# Altium PCB Power_Box_V0.PcbDoc (part 4 of 4)
Units mm, origin at the board's own origin, x right, y up, seen from the top; angles counter-clockwise.
Board outline 145 x 110 mm, 2 copper layers (Top Layer, Bottom Layer); 400 components, 300 nets, 1205 pads, 270 vias.
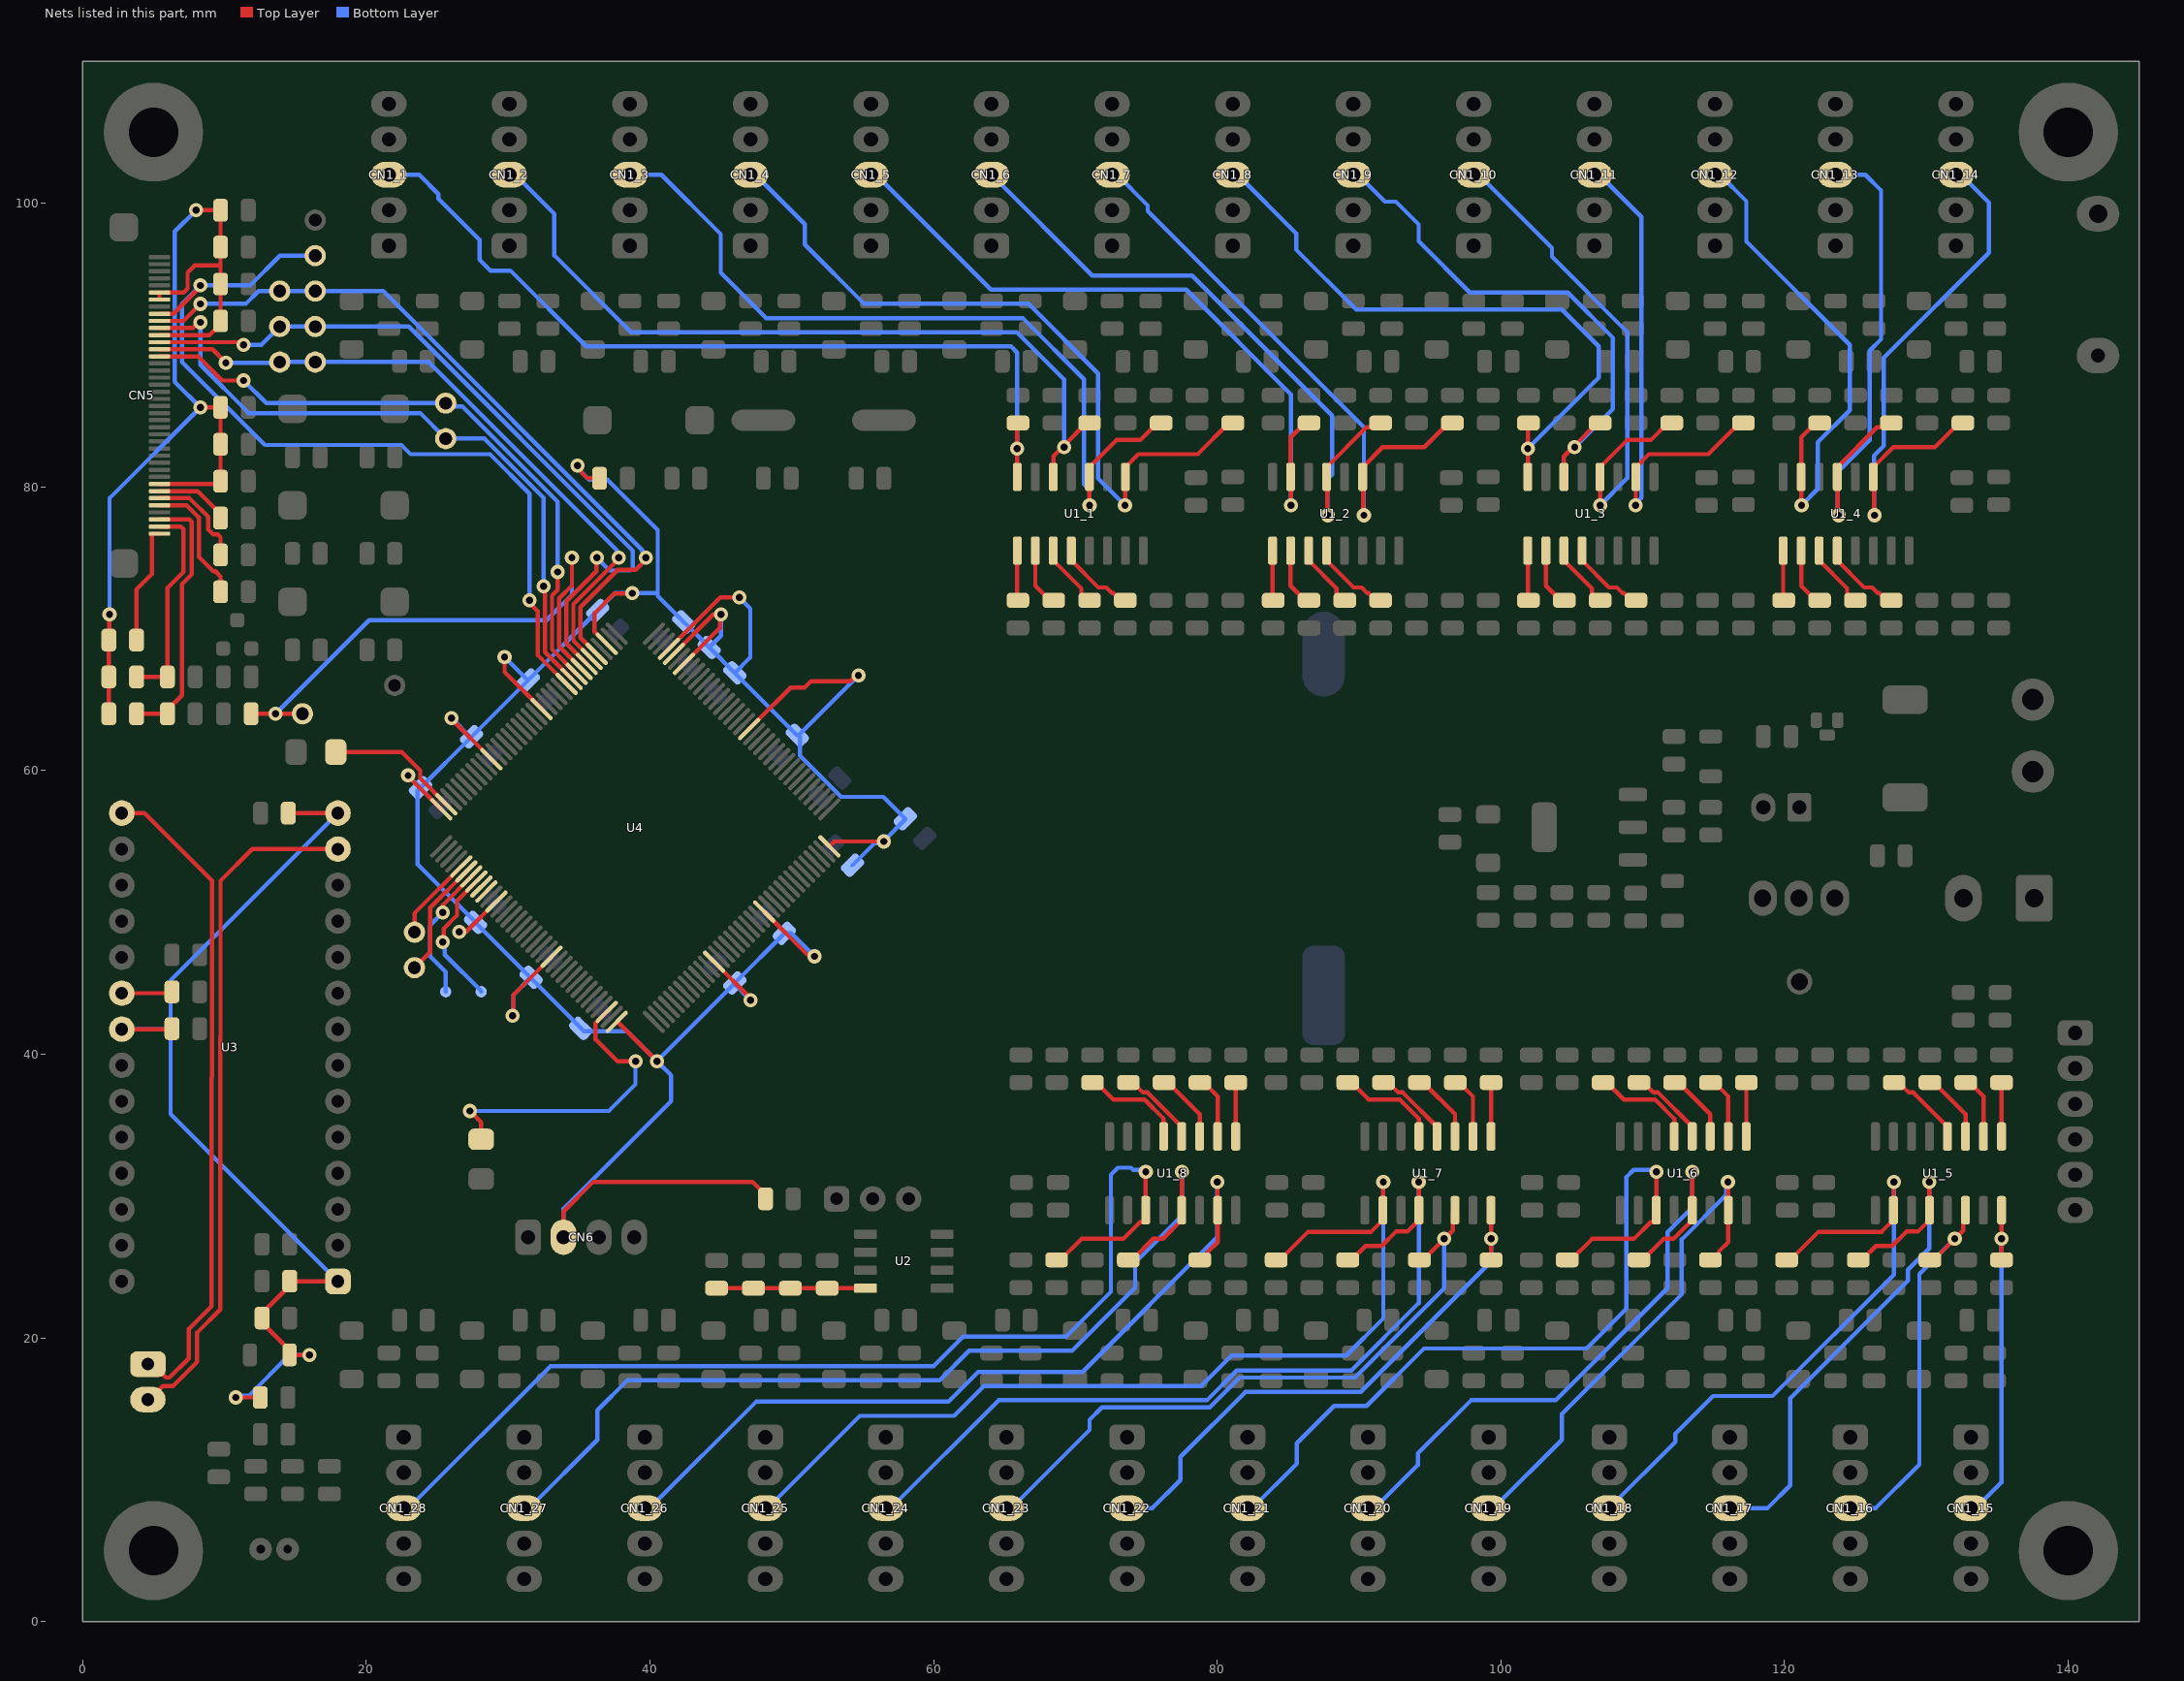
[diagram p4: the nets of this part, all layers, seen from the top]

## Via types
v1: diameter 1, hole 0.5, Top Layer to Bottom Layer, 270 vias

## Nets (pads, with @x,y where several pads share a name; then routed paths per layer and width w, separated by ;. In a path a pad name is that pad's centre, name@x,y a point inside that pad or via, vN(x,y) a via of type N, cw(c..) or ccw(c..) an arc to the next point about the centre after c; other vN are vias at no path point) (continued)
NetR5_6_1: R5_6.1 U1_6.5 | length 7.3
  Top Layer w0.3: R5_6.1@107.202,38 107.477,38 108.677,36.8 110.87,36.8 112.217,35.454 112.217,34.203 U1_6.5@112.22,34.2
NetR5_7_1: R5_7.1 U1_7.5 | length 7.3
  Top Layer w0.3: R5_7.1@89.202,38 89.477,38 90.677,36.8 92.87,36.8 94.217,35.454 94.217,34.203 U1_7.5@94.22,34.2
NetR5_8_1: R5_8.1 U1_8.5 | length 7.3
  Top Layer w0.3: R5_8.1@71.202,38 71.477,38 72.677,36.8 74.87,36.8 76.217,35.454 76.217,34.203 U1_8.5@76.22,34.2
NetR6_1_1: R6_1.1 U1_1.4 | length 5.7
  Top Layer w0.3: U1_1.4@69.71,75.5 69.71,74.813 71.615,72.908 72.178,72.908 72.585,72.5 72.684,72.5 73.184,72 R6_1.1@73.52,72
NetR6_2_1: R6_2.1 U1_2.4 | length 5.7
  Top Layer w0.3: U1_2.4@87.71,75.5 87.71,74.813 89.615,72.908 90.178,72.908 90.585,72.5 90.684,72.5 91.184,72 R6_2.1@91.52,72
NetR6_3_1: R6_3.1 U1_3.4 | length 5.7
  Top Layer w0.3: U1_3.4@105.71,75.5 105.71,74.813 107.615,72.908 108.178,72.908 108.585,72.5 108.684,72.5 109.184,72 R6_3.1@109.52,72
NetR6_4_1: R6_4.1 U1_4.4 | length 5.7
  Top Layer w0.3: U1_4.4@123.71,75.5 123.71,74.813 125.615,72.908 126.178,72.908 126.585,72.5 126.684,72.5 127.184,72 R6_4.1@127.52,72
NetR6_5_1: R6_5.1 U1_5.4 | length 5.7
  Top Layer w0.3: R6_5.1@127.723,38 128.058,38 128.758,37.3 129.073,37.3 131.485,34.887 U1_5.4@131.485,34.2
NetR6_6_1: R6_6.1 U1_6.4 | length 5.7
  Top Layer w0.3: R6_6.1@109.727,38 110.063,38 110.763,37.3 111.078,37.3 113.49,34.887 U1_6.4@113.49,34.2
NetR6_7_1: R6_7.1 U1_7.4 | length 5.7
  Top Layer w0.3: R6_7.1@91.727,38 92.063,38 92.763,37.3 93.078,37.3 95.49,34.887 U1_7.4@95.49,34.2
NetR6_8_1: R6_8.1 U1_8.4 | length 5.7
  Top Layer w0.3: R6_8.1@73.727,38 74.063,38 74.763,37.3 75.078,37.3 77.49,34.887 U1_8.4@77.49,34.2
NetR9_1_1: R9_1.1 U1_1.3 | length 4.7
  Top Layer w0.3: U1_1.3@68.44,75.5 68.44,74.813 70.413,72.839 70.413,72.366 70.78,72 R9_1.1@70.994,72
NetR9_2_1: R9_2.1 U1_2.3 | length 4.7
  Top Layer w0.3: U1_2.3@86.44,75.5 86.44,74.813 88.413,72.839 88.413,72.366 88.78,72 R9_2.1@88.994,72
NetR9_3_1: R9_3.1 U1_3.3 | length 4.7
  Top Layer w0.3: U1_3.3@104.44,75.5 104.44,74.813 106.413,72.839 106.413,72.366 106.78,72 R9_3.1@106.994,72
NetR9_4_1: R9_4.1 U1_4.3 | length 4.7
  Top Layer w0.3: U1_4.3@122.44,75.5 122.44,74.813 124.413,72.839 124.413,72.366 124.78,72 R9_4.1@124.994,72
NetR9_5_1: R9_5.1 U1_5.3 | length 5
  Top Layer w0.3: R9_5.1@130.248,38 130.523,38 132.755,35.768 U1_5.3@132.755,34.2
NetR9_6_1: R9_6.1 U1_6.3 | length 5
  Top Layer w0.3: R9_6.1@112.253,38 112.528,38 114.76,35.768 U1_6.3@114.76,34.2
NetR9_7_1: R9_7.1 U1_7.3 | length 5
  Top Layer w0.3: R9_7.1@94.253,38 94.528,38 96.76,35.768 U1_7.3@96.76,34.2
NetR9_8_1: R9_8.1 U1_8.3 | length 5
  Top Layer w0.3: R9_8.1@76.253,38 76.528,38 78.76,35.768 U1_8.3@78.76,34.2
NetR10_1_1: R10_1.1 U1_1.2 | length 4.2
  Top Layer w0.3: U1_1.2@67.17,75.5 67.17,73.023 68.193,72 R10_1.1@68.468,72
NetR10_2_1: R10_2.1 U1_2.2 | length 4.2
  Top Layer w0.3: U1_2.2@85.17,75.5 85.17,73.023 86.193,72 R10_2.1@86.468,72
NetR10_3_1: R10_3.1 U1_3.2 | length 4.2
  Top Layer w0.3: U1_3.2@103.17,75.5 103.17,73.023 104.193,72 R10_3.1@104.468,72
NetR10_4_1: R10_4.1 U1_4.2 | length 4.2
  Top Layer w0.3: U1_4.2@121.17,75.5 121.17,73.023 122.193,72 R10_4.1@122.468,72
NetR10_5_1: R10_5.1 U1_5.2 | length 4.5
  Top Layer w0.3: R10_5.1@132.774,38 133.049,38 134.025,37.024 U1_5.2@134.025,34.2
NetR10_6_1: R10_6.1 U1_6.2 | length 4.5
  Top Layer w0.3: R10_6.1@114.779,38 115.054,38 116.03,37.024 U1_6.2@116.03,34.2
NetR10_7_1: R10_7.1 U1_7.2 | length 4.5
  Top Layer w0.3: R10_7.1@96.779,38 97.054,38 98.03,37.024 U1_7.2@98.03,34.2
NetR10_8_1: R10_8.1 U1_8.2 | length 4.5
  Top Layer w0.3: R10_8.1@78.779,38 79.054,38 80.03,37.024 U1_8.2@80.03,34.2
NetR16_2: R16.2 U3.20 | length 3.6
  Top Layer w0.3: U3.20@2.76,44.3 6.2,44.3 R16.2@6.3,44.4
NetR31_1_1: R31_1.1 U1_1.1 | length 3.5
  Top Layer w0.3: U1_1.1@65.9,75.5 65.9,72.042 R31_1.1@65.942,72
NetR31_2_1: R31_2.1 U1_2.1 | length 3.5
  Top Layer w0.3: U1_2.1@83.9,75.5 83.9,72.042 R31_2.1@83.942,72
NetR31_3_1: R31_3.1 U1_3.1 | length 3.5
  Top Layer w0.3: U1_3.1@101.9,75.5 101.9,72.042 R31_3.1@101.942,72
NetR31_4_1: R31_4.1 U1_4.1 | length 3.5
  Top Layer w0.3: U1_4.1@119.9,75.5 119.9,72.042 R31_4.1@119.942,72
NetR31_5_1: R31_5.1 U1_5.1 | length 3.8
  Top Layer w0.3: U1_5.1@135.295,34.2 135.295,37.995 R31_5.1@135.3,38
NetR31_6_1: R31_6.1 U1_6.1 | length 3.8
  Top Layer w0.3: U1_6.1@117.3,34.2 117.3,37.995 R31_6.1@117.305,38
NetR31_7_1: R31_7.1 U1_7.1 | length 3.8
  Top Layer w0.3: U1_7.1@99.3,34.2 99.3,37.995 R31_7.1@99.305,38
NetR31_8_1: R31_8.1 U1_8.1 | length 3.8
  Top Layer w0.3: U1_8.1@81.3,34.2 81.3,37.995 R31_8.1@81.305,38
NetSB1_2: U4.82
NetSB2_2: U4.81
NetSB3_2: SB3.2 U4.80 | length 9.9
  Top Layer w0.3: v1(25.4,47.9) 25.452,47.952 25.452,48.85 26.4,49.798 26.4,50.815 U4.80@27.76,52.175
  Bottom Layer w0.3: v1(25.4,47.9) 25.534,47.766 25.534,47.026 28.1,44.46 SB3.2@28.1,44.4
NetSB4_2: SB4.2 U4.79 | length 9.8
  Top Layer w0.3: v1(25.4,50) 25.4,50.522 U4.79@27.406,52.528
  Bottom Layer w0.3: v1(25.4,50) 24.5,49.1 24.5,46.9 25.6,45.8 SB4.2@25.6,44.4
RELAY1: CN1_1.3 R32_1.1 U1_1.16 | length 61.1
  Top Layer w0.3: U1_1.16@65.9,80.7 65.9,84.455 R32_1.1@65.945,84.5
  Bottom Layer w0.3: CN1_1.3@21.587,102 23.73,102 25.09,100.64 25.09,100.31 27.987,97.413 27.987,96.012 28.749,95.25 30.15,95.25 35.5,89.9 65.457,89.9 65.895,89.462 v1(65.895,82.7)
RELAY2: CN1_2.3 R34_1.1 U1_1.14 | length 56.6
  Top Layer w0.3: U1_1.14@68.44,80.7 68.44,82.15 69.09,82.8 v1(69.2,82.8) 69.2,82.917 70.783,84.5 R34_1.1@70.997,84.5
  Bottom Layer w0.3: CN1_2.3@30.087,102 30.499,102 33.263,99.235 33.263,96.305 38.669,90.9 65.872,90.9 69.2,87.572 v1(69.2,82.8)
RELAY3: CN1_3.3 R36_1.1 U1_1.12 | length 57.6
  Top Layer w0.3: U1_1.12@70.98,80.7 70.98,81.388 72.892,83.3 74.573,83.3 75.773,84.5 R36_1.1@76.048,84.5 ; v1@70.988,78.708 U1_1.12@70.988,80.692
  Bottom Layer w0.3: CN1_3.3@38.587,102 40.8,102 44.987,97.813 44.987,96.012 44.987,95.106 48.193,91.9 50.9,91.9 66.286,91.9 70.6,87.586 70.6,80.181 70.995,79.786 v1(70.995,78.7)
RELAY4: CN1_4.3 R39_1.1 U1_1.10 | length 52.8
  Top Layer w0.3: v1@73.508,78.712 U1_1.10@73.508,80.688 ; U1_1.10@73.52,80.7 73.52,81.384 74.436,82.3 78.625,82.3 80.825,84.5 R39_1.1@81.1,84.5
  Bottom Layer w0.3: CN1_4.3@47.087,102 47.437,102 50.912,98.525 50.912,97.088 55.1,92.9 66.7,92.9 71.6,88 71.6,80.595 v1(73.495,78.7)
RELAY5: CN1_5.3 R33_2.1 U1_2.15 | length 50.3
  Top Layer w0.3: U1_2.15@85.17,80.7 85.17,83.474 86.196,84.5 R33_2.1@86.471,84.5 ; v1@85.183,78.713 U1_2.15@85.183,80.687
  Bottom Layer w0.3: CN1_5.3@55.587,102 55.937,102 64.037,93.9 77.807,93.9 85.195,86.512 v1(85.195,78.7)
RELAY6: CN1_6.3 R35_2.1 U1_2.13 | length 46.7
  Top Layer w0.3: U1_2.13@87.71,80.7 87.71,81.388 90.517,84.194 91.217,84.194 R35_2.1@91.523,84.5 ; U1_2.13@87.733,80.677 87.755,80.655 87.755,78.045 v1(87.8,78)
  Bottom Layer w0.3: CN1_6.3@64.087,102 71.187,94.9 78.221,94.9 88.1,85.021 88.1,80.867 87.755,80.522 87.755,78.045 v1(87.8,78)
RELAY7: CN1_7.3 R38_2.1 U1_2.11 | length 42.6
  Top Layer w0.3: U1_2.11@90.25,80.7 90.25,81.388 91.663,82.8 94.599,82.8 96.299,84.5 R38_2.1@96.574,84.5 ; U1_2.11@90.273,80.677 90.295,80.655 90.295,78.045 v1(90.34,78)
  Bottom Layer w0.3: CN1_7.3@72.587,102 72.937,102 75.1,99.837 75.1,99.436 90.34,84.196 v1(90.34,78)
RELAY8: CN1_8.3 R32_3.1 U1_3.16 | length 44.6
  Top Layer w0.3: U1_3.16@101.9,80.7 101.9,84.455 R32_3.1@101.945,84.5
  Bottom Layer w0.3: CN1_8.3@81.087,102 81.437,102 85.562,97.875 85.562,96.731 89.793,92.5 104.3,92.5 106.9,89.9 106.9,87.7 106.6,87.4 106.595,87.4 v1(101.895,82.7)
RELAY9: CN1_9.3 R34_3.1 U1_3.14 | length 37.6
  Top Layer w0.3: U1_3.14@104.44,80.7 104.44,82.15 105.09,82.8 v1(105.2,82.8) 105.2,82.917 106.783,84.5 R34_3.1@106.997,84.5
  Bottom Layer w0.3: CN1_9.3@89.587,102 89.937,102 91.831,100.106 92.594,100.106 94.2,98.5 94.2,97.314 97.814,93.7 104.707,93.7 107.9,90.507 107.9,85.5 v1(105.2,82.8)
RELAY10: CN1_10.3 R36_3.1 U1_3.12 | length 37.8
  Top Layer w0.3: U1_3.12@106.98,80.7 106.98,81.388 108.893,83.3 110.573,83.3 111.773,84.5 R36_3.1@112.048,84.5 ; v1@106.988,78.708 U1_3.12@106.988,80.692
  Bottom Layer w0.3: CN1_10.3@98.087,102 98.437,102 103.6,96.837 103.6,96.221 108.9,90.921 108.9,80.605 v1(106.995,78.7)
RELAY11: CN1_11.3 R39_3.1 U1_3.10 | length 36.6
  Top Layer w0.3: v1@109.508,78.712 U1_3.10@109.508,80.688 ; U1_3.10@109.52,80.7 109.52,81.384 110.436,82.3 114.625,82.3 116.825,84.5 R39_3.1@117.1,84.5
  Bottom Layer w0.3: CN1_11.3@106.587,102 106.937,102 109.9,99.037 109.9,79.226 109.495,78.821 v1(109.495,78.7)
RELAY12: CN1_12.3 R33_4.1 U1_4.15 | length 35.3
  Top Layer w0.3: U1_4.15@121.17,80.7 121.17,83.474 122.196,84.5 R33_4.1@122.471,84.5 ; v1@121.183,78.713 U1_4.15@121.183,80.687
  Bottom Layer w0.3: CN1_12.3@115.087,102 115.437,102 117.3,100.137 117.3,97.3 124.6,90 124.6,85.402 122.35,83.152 122.35,79.855 v1(121.195,78.7)
RELAY13: CN1_13.3 R35_4.1 U1_4.13 | length 36.3
  Top Layer w0.3: U1_4.13@123.71,80.7 123.71,81.388 126.517,84.194 127.217,84.194 R35_4.1@127.523,84.5 ; U1_4.13@123.733,80.677 123.755,80.655 123.755,78.045 v1(123.8,78)
  Bottom Layer w0.3: CN1_13.3@123.587,102 125.7,102 126.8,100.9 126.8,90.4 125.995,89.595 125.995,83.295 123.755,81.055 123.755,78.045 v1(123.8,78)
RELAY14: CN1_14.3 R38_4.1 U1_4.11 | length 39.5
  Top Layer w0.3: U1_4.11@126.25,80.7 126.25,81.388 127.663,82.8 130.599,82.8 132.299,84.5 R38_4.1@132.574,84.5 ; U1_4.11@126.273,80.677 126.295,80.655 126.295,78.045 v1(126.34,78)
  Bottom Layer w0.3: v1(126.34,78) 126.295,78.045 126.295,82.181 126.995,82.881 126.995,89.102 134.4,96.507 134.4,100.037 132.437,102 CN1_14.3@132.087,102
RELAY15: CN1_15.3 R32_5.1 U1_5.16 | length 23.6
  Top Layer w0.3: U1_5.16@135.295,29 135.295,25.505 R32_5.1@135.3,25.5
  Bottom Layer w0.3: CN1_15.3@133.137,8 133.487,8 135.3,9.813 v1(135.3,27)
RELAY16: CN1_16.3 R34_5.1 U1_5.14 | length 27.8
  Top Layer w0.3: R34_5.1@130.245,25.5 130.52,25.5 132.596,27.576 132.596,28.841 U1_5.14@132.755,29
  Bottom Layer w0.3: CN1_16.3@124.637,8 126.43,8 129.5,11.07 129.5,24.5 v1(132,27)
RELAY17: CN1_17.3 R36_5.1 U1_5.12 | length 39.3
  Top Layer w0.3: R36_5.1@125.195,25.5 125.47,25.5 126.45,26.48 127.578,26.48 128.592,27.494 129.396,27.494 130.215,28.313 U1_5.12@130.215,29 130.208,29.008 130.208,30.992 v1(130.2,31)
  Bottom Layer w0.3: CN1_17.3@116.137,8 118.8,8 120.4,9.6 120.4,15.736 128.7,24.036 128.7,24.8 130.2,26.3 v1(130.2,31)
RELAY18: CN1_18.3 R39_5.1 U1_5.10 | length 45.2
  Top Layer w0.3: R39_5.1@120.145,25.5 120.42,25.5 122.4,27.48 126.842,27.48 127.675,28.313 U1_5.10@127.675,29 127.688,29.012 127.688,30.988 v1(127.7,31)
  Bottom Layer w0.3: CN1_18.3@107.637,8 112.3,12.663 112.3,13.238 114.962,15.9 119.15,15.9 127.7,24.45 v1(127.7,31)
RELAY19: CN1_19.3 R33_6.1 U1_6.15 | length 36.3
  Top Layer w0.3: R33_6.1@114.775,25.5 114.989,25.5 115.356,25.866 115.356,26.081 116.03,26.755 U1_6.15@116.03,29 116.017,29.013 116.017,30.987 v1(116.005,31)
  Bottom Layer w0.3: CN1_19.3@99.137,8 99.487,8 104.3,12.813 104.3,14.636 112.75,23.086 112.75,26.947 115.871,30.068 115.871,30.866 v1(116.005,31)
RELAY20: CN1_20.3 R35_6.1 U1_6.13 | length 45.2
  Top Layer w0.3: R35_6.1@109.725,25.5 110.005,25.5 111.499,26.994 112.171,26.994 113.49,28.313 U1_6.13@113.49,29 ; U1_6.13@113.467,29.023 113.5,29.055 113.495,29.06 113.495,31.695 v1(113.5,31.7)
  Bottom Layer w0.3: CN1_20.3@90.637,8 91.1,8 94.14,11.04 94.14,11.847 97.893,15.6 103.85,15.6 111.75,23.5 111.75,27.45 113.5,29.2 v1(113.5,31.7)
RELAY21: CN1_21.3 R38_6.1 U1_6.11 | length 55.9
  Top Layer w0.3: R38_6.1@104.675,25.5 104.95,25.5 106.43,26.98 109.376,26.98 110.55,28.154 110.788,28.154 110.95,28.316 U1_6.11@110.95,29 110.955,29.005 110.955,31.695 v1(110.96,31.7)
  Bottom Layer w0.3: CN1_21.3@82.137,8 82.487,8 85.61,11.123 85.61,12.567 88.243,15.2 90.528,15.2 94.578,19.25 106.043,19.25 108.855,22.062 108.855,31.352 109.353,31.85 109.86,31.85 109.876,31.834 110.826,31.834 v1(110.96,31.7)
RELAY22: CN1_22.3 R32_7.1 U1_7.16 | length 38.9
  Top Layer w0.3: U1_7.16@99.3,29 99.3,25.505 R32_7.1@99.305,25.5
  Bottom Layer w0.3: CN1_22.3@73.637,8 75.43,8 77.4,9.97 77.4,11.607 81.993,16.2 90.114,16.2 99.305,25.391 v1(99.305,27)
RELAY23: CN1_23.3 R34_7.1 U1_7.14 | length 45.9
  Top Layer w0.3: R34_7.1@94.25,25.5 94.525,25.5 96.601,27.576 96.601,28.841 U1_7.14@96.76,29
  Bottom Layer w0.3: CN1_23.3@65.137,8 65.487,8 71,13.513 71,14.224 71.876,15.1 79.479,15.1 81.579,17.2 89.7,17.2 96.005,23.505 v1(96.005,27)
RELAY24: CN1_24.3 R36_7.1 U1_7.12 | length 61
  Top Layer w0.3: R36_7.1@89.2,25.5 89.475,25.5 90.455,26.48 91.583,26.48 92.597,27.494 93.401,27.494 94.22,28.313 U1_7.12@94.22,29 94.212,29.008 94.212,30.992 v1(94.205,31)
  Bottom Layer w0.3: CN1_24.3@56.637,8 56.987,8 64.587,15.6 79.272,15.6 81.372,17.7 89.45,17.7 94.205,22.455 v1(94.205,31)
RELAY25: CN1_25.3 R39_7.1 U1_7.10 | length 70.1
  Top Layer w0.3: R39_7.1@84.15,25.5 84.425,25.5 86.405,27.48 90.847,27.48 91.68,28.313 U1_7.10@91.68,29 91.692,29.012 91.692,30.988 v1(91.705,31)
  Bottom Layer w0.3: CN1_25.3@48.137,8 48.3,8 54.8,14.5 61.448,14.5 63.548,16.6 78.857,16.6 81.007,18.75 89.086,18.75 91.705,21.369 v1(91.705,31)
RELAY26: CN1_26.3 R33_8.1 U1_8.15 | length 58.3
  Top Layer w0.3: R33_8.1@78.775,25.5 78.989,25.5 79.356,25.866 79.356,26.081 80.03,26.755 U1_8.15@80.03,29 80.017,29.013 80.017,30.987 v1(80.005,31)
  Bottom Layer w0.3: CN1_26.3@39.637,8 39.987,8 47.487,15.5 61.033,15.5 63.133,17.6 70.493,17.6 80.005,27.112 v1(80.005,31)
RELAY27: CN1_27.3 R35_8.1 U1_8.13 | length 68.6
  Top Layer w0.3: R35_8.1@73.725,25.5 74.005,25.5 75.499,26.994 76.171,26.994 77.49,28.313 U1_8.13@77.49,29 ; U1_8.13@77.467,29.023 77.5,29.055 77.495,29.06 77.495,31.695 v1(77.5,31.7)
  Bottom Layer w0.3: CN1_27.3@31.137,8 31.487,8 36.3,12.813 36.3,14.9 38.4,17 60.412,17 62.512,19.1 69.764,19.1 74.205,23.541 74.205,25.305 77.5,28.6 v1(77.5,31.7)
RELAY28: CN1_28.3 R38_8.1 U1_8.11 | length 78.1
  Top Layer w0.3: R38_8.1@68.675,25.5 68.95,25.5 70.43,26.98 73.376,26.98 74.55,28.154 74.788,28.154 74.95,28.316 U1_8.11@74.95,29 74.955,29.005 74.955,31.695 v1(74.96,31.7)
  Bottom Layer w0.3: CN1_28.3@22.637,8 22.987,8 32.987,18 59.998,18 62.098,20.1 69.35,20.1 72.5,23.25 72.5,30.502 72.5,31.5 73,32 73.907,32 74.073,31.834 74.826,31.834 v1(74.96,31.7)
SPK_N: CN4.2 U3.13 | length 48.4
  Top Layer w0.3: CN4.2@4.6,15.65 4.711,15.65 5.661,16.6 6.373,16.6 8.076,18.303 8.076,20.376 9.7,22 9.7,41.256 9.725,41.281 9.725,52.226 11.959,54.46 U3.13@18,54.46
SPK_P: CN4.1 U3.15 | length 46.5
  Top Layer w0.3: U3.15@2.76,57 4.351,57 9.125,52.226 9.125,41.256 9.125,38.409 9.1,38.384 9.1,22.249 7.476,20.624 7.476,18.551 6.124,17.2 5.876,17.2 4.926,18.15 CN4.1@4.6,18.15
TFT_BLK: R24.1 TP9.1 U4.44 | length 39.5
  Top Layer w0.3: R24.1@11.875,64 v1(13.6,64) TP9.1@15.5,64 ; v1(34.5,75) 34.5,73.036 33.6,72.136 33.6,68.75 U4.44@35.184,67.166
  Bottom Layer w0.3: v1(13.6,64) 20.2,70.6 32.7,70.6 34.5,72.4 v1(34.5,75)
TFT_CLK: CN5.10 TP4.1 TP10.1 U4.41 | length 53
  Top Layer w0.3: CN5.10@5.415,91.7 7.1,91.7 v1(8.3,92.9) ; U4.41@36.245,68.226 35.1,69.371 35.1,71.514 37.736,74.15 38.994,74.15 39.7,74.856 v1(39.7,75)
  Bottom Layer w0.3: v1(8.3,92.9) 11.5,92.9 12.4,93.8 TP10.1@13.9,93.8 TP4.1@16.4,93.8 21.198,93.8 39.477,75.521 39.477,75.412 39.7,75.189 v1(39.7,75)
TFT_CS: CN5.9 TP3.1 U4.47 | length 61.5
  Top Layer w0.3: CN5.9@5.415,92.2 6.398,92.2 8.2,94.002 v1@8.2,94.2 ; v1(31.5,72) 31.5,71.811 32.1,71.211 32.1,68.128 32.35,67.878 U4.47@34.124,66.105
  Bottom Layer w0.3: TP3.1@16.4,96.3 13.9,96.3 11.8,94.2 v1(8.3,94.2) 7,92.9 7,88.8 12.85,82.95 22.475,82.95 23.125,82.3 28.725,82.3 31.5,79.525 v1(31.5,72)
TFT_CS_2: TP13.1 U4.77 | length 6
  Top Layer w0.3: TP13.1@23.4,48.6 23.4,49.937 U4.77@26.699,53.236
TFT_CS_3: TP14.1 U4.78 | length 8.3
  Top Layer w0.3: TP14.1@23.4,46.1 24.5,47.2 24.5,50.329 U4.78@27.052,52.882
TFT_DC: CN5.11 TP5.1 U4.46 | length 47.7
  Top Layer w0.3: CN5.11@5.415,91.2 7.774,91.2 8.174,91.6 v1(8.3,91.6) ; v1(32.5,73) 32.6,72.9 32.6,68.336 U4.46@34.477,66.458
  Bottom Layer w0.3: v1(8.3,91.6) 8.3,88.6 11.7,85.2 23.8,85.2 TP5.1@25.6,83.4 28.332,83.4 32.5,79.232 v1(32.5,73)
TFT_IM0: CN5.38 R22.1 R27.2 | length 18.8
  Top Layer w0.3: R22.1@3.8,63.997 R27.2@5.975,63.997 5.975,64.272 7,65.297 7,73.15 7.7,73.85 7.7,77.524 7.524,77.7 CN5.38@5.415,77.7
TFT_IM1: CN5.39 R21.1 R26.2 | length 14.8
  Top Layer w0.3: R21.1@3.8,66.6 R26.2@5.975,66.6 5.975,72.875 7.104,74.004 7.104,77.024 6.928,77.2 CN5.39@5.415,77.2
TFT_IM2: CN5.40 R20.1 | length 8.5
  Top Layer w0.3: R20.1@3.8,69.2 3.8,72.763 4.89,73.853 4.89,76.7 CN5.40@5.415,76.7
TFT_LED_K1: CN5.34 R18.2 | length 5.3
  Top Layer w0.3: CN5.34@5.415,79.7 8.1,79.7 9.725,78.075 R18.2@9.725,77.8
TFT_LED_K2: CN5.35 R19.2 | length 7.2
  Top Layer w0.3: CN5.35@5.415,79.2 7.538,79.2 8.85,77.888 8.85,77.009 9.209,76.65 9.525,76.65 9.725,76.45 R19.2@9.725,75.2
TFT_LED_K3: CN5.36 R23.2 | length 9.1
  Top Layer w0.3: CN5.36@5.415,78.7 7.331,78.7 8.2,77.831 8.2,75.059 9.217,74.042 9.358,74.042 9.725,73.675 R23.2@9.725,72.6
TFT_MISO: CN5.14 TP7.1 TP12.1 U4.42 | length 47.7
  Top Layer w0.3: CN5.14@5.415,89.7 9.15,89.7 v1(10.1,88.75) ; U4.42@35.891,67.873 34.6,69.164 34.6,71.721 37.8,74.921 v1(37.8,75)
  Bottom Layer w0.3: v1(10.1,88.75) 13.85,88.75 TP7.1@13.9,88.8 TP12.1@16.4,88.8 24.4,88.8 37.666,75.534 37.666,75.134 v1(37.8,75)
TFT_MOSI: CN5.13 TP6.1 TP11.1 U4.43 | length 53.7
  Top Layer w0.3: CN5.13@5.415,90.2 10.961,90.2 11.161,90 v1(11.35,90) ; U4.43@35.538,67.519 34.1,68.957 34.1,71.928 36.222,74.05 36.222,74.972 v1(36.25,75)
  Bottom Layer w0.3: v1(11.35,90) 12.6,90 TP6.1@13.9,91.3 TP11.1@16.4,91.3 22.991,91.3 38.8,75.491 38.8,74.276 38.624,74.1 37.15,74.1 v1(36.25,75)
TFT_RES: CN5.15 TP8.1 U4.45 | length 45.3
  Top Layer w0.3: CN5.15@5.415,89.2 8.15,89.2 9.85,87.5 v1(11.35,87.5) ; v1(33.5,74) 33.5,72.743 33.1,72.343 33.1,68.543 U4.45@34.831,66.812
  Bottom Layer w0.3: v1(11.35,87.5) 12.95,85.9 TP8.1@25.6,85.9 25.83,85.67 26.769,85.67 33.5,78.939 v1(33.5,74)
V_CAP_1: C35.1 U4.71 | length 9.6
  Top Layer w0.3: C35.1@17.845,61.3 22.502,61.3 23.8,60.002 23.8,59.458 U4.71@25.638,57.62
V_CAP_2: C40.1 U4.106 | length 22.2
  Top Layer w0.3: v1(27.3,36) 28.1,35.2 C40.1@28.1,34 ; U4.106@36.952,42.982 36.169,42.2 36.169,41.038 37.707,39.5 v1(39,39.5)
  Bottom Layer w0.3: v1(27.3,36) 37.1,36 38.978,37.878 38.978,39.478 v1(39,39.5)
VCC_EEPROM: C4.1 FB2.1 R11.2 R12.2 U2.8 | length 10.5
  Top Layer w0.3: FB2.1@44.7,23.5 C4.1@52.5,23.5 U2.8@55.2,23.5
VCC_ISD: C9.1 C10.1 C11.1 FB3.2 LED2.1 R14.2 U3.1 U3.14 U3.21 | length 73.2
  Top Layer w0.3: U3.21@2.76,41.76 6.26,41.76 C11.1@6.3,41.8 ; v1(10.8,15.8) R14.2@12.525,15.8 ; C10.1@14.5,57 U3.14@18,57 ; LED2.1@14.6,18.8 LED2.1@14.6,19 ; v1(16,18.8) 14.8,18.8 LED2.1@14.6,19 ; U3.1@18,23.98 14.62,23.98 C9.1@14.6,24 14.6,23.675 12.65,21.725 FB3.2@12.65,21.4 12.65,21.088 14.6,19.138 LED2.1@14.6,19
  Bottom Layer w0.3: U3.21@2.76,41.76 6.16,41.76 6.2,41.8 ; v1(10.8,15.8) 10.934,15.934 11.734,15.934 14.6,18.8 v1(16,18.8) ; U3.1@18,23.98 6.2,35.78 6.2,41.8 ; U3.14@18,57 6.2,45.2 6.2,41.8
VCC_MCU: C21.1 C22.1 C23.1 C24.1 C25.1 C26.1 C27.1 C28.1 C29.1 C30.1 C31.1 C32.1 C33.1 C34.1 CN6.2 FB5.2 R28.2 R29.1 U4.17 U4.30 U4.32 U4.33 U4.39 U4.52 U4.62 U4.72 U4.84 U4.95 U4.108 U4.121 U4.131 U4.144 | length 238.6
  Top Layer w0.3: v1(22.95,59.65) 22.95,59.601 U4.72@25.285,57.266 ; v1(26,63.7) 26,63.622 U4.62@28.82,60.802 ; v1(26.543,48.625) 27.038,48.625 U4.84@29.174,50.761 ; v1(29.75,68) 29.75,66.943 U4.52@32.356,64.337 ; v1(30.319,42.721) 30.363,42.765 30.363,44.171 U4.95@33.063,46.872 ; CN6.2@33.9,27.1 33.9,28.9 36,31 47.225,31 48.15,30.075 R29.1@48.15,29.8 ; v1(34.9,81.5) 35.034,81.366 35.034,81.166 35.6,80.6 R28.2@36.45,80.6 ; U4.39@36.952,68.933 36.1,69.785 36.1,71.1 37.472,72.472 38.722,72.472 v1(38.75,72.5) ; U4.108@37.659,42.275 37.692,42.308 v1(40.5,39.5) ; U4.33@41.336,68.58 44.956,72.2 v1(46.3,72.2) ; U4.32@41.69,68.226 44.463,71 v1(45,71) 44.928,70.928 44.928,70.05 U4.30@42.397,67.519 ; U4.121@44.518,46.518 47.1,43.936 v1(47.1,43.8) ; U4.17@46.993,62.923 47.629,63.559 49.92,65.85 50.902,65.85 51.352,66.3 54.111,66.3 54.511,66.7 v1(54.7,66.7) ; U4.131@48.054,50.054 51.073,47.034 51.466,47.034 v1(51.6,46.9) ; U4.144@52.65,54.65 53,55 v1(56.5,55)
  Bottom Layer w0.3: v1(22.95,59.65) C32.1@23.821,58.779 ; v1(26,63.7) 27.321,62.379 C29.1@27.421,62.379 ; v1(26.543,48.625) 26.558,48.611 27.011,48.611 C28.1@27.7,49.3 ; v1(29.75,68) 31.371,66.379 C30.1@31.421,66.379 ; v1(30.319,42.721) 30.366,42.768 30.366,44.171 31.545,45.35 C22.1@31.621,45.35 ; C22.1@31.621,45.421 C22.1@31.621,45.35 ; CN6.2@33.9,27.1 33.9,29.1 41.5,36.7 41.5,38.5 v1(40.5,39.5) ; v1(34.9,81.5) 34.9,81.311 35.458,80.752 35.458,80.742 35.7,80.5 37,80.5 40.55,76.95 40.55,72.5 ; v1(45,71) 45,69.5 C31.1@44.179,68.679 ; v1(46.3,72.2) 47.075,71.425 47.075,67.975 C23.1@45.979,66.879 ; v1(47.1,43.8) C27.1@45.979,44.921 ; v1(51.6,46.9) 49.979,48.521 C34.1@49.479,48.521 C27.1@45.979,45.021 C27.1@45.979,44.921 ; C26.1@54.279,53.321 55.824,54.866 56.366,54.866 v1(56.5,55) 56.5,55.05 58,56.55 FB5.2@58,56.6 56.461,58.139 53.481,58.139 50.573,61.047 50.573,62.384 C25.1@50.479,62.479 ; v1(54.7,66.7) C25.1@50.479,62.479 ; C32.1@23.821,58.779 23.627,58.584 23.627,53.373 C28.1@27.7,49.3 ; C32.1@23.821,58.779 C29.1@27.421,62.379 ; C29.1@27.421,62.379 C30.1@31.421,66.379 ; C28.1@27.7,49.3 27.7,49.271 C22.1@31.621,45.35 ; C30.1@31.421,66.379 C24.1@36.321,71.279 37.542,72.5 40.55,72.5 ; C22.1@31.621,45.35 35.121,41.85 C21.1@35.121,41.821 35.316,41.627 38.373,41.627 v1(40.5,39.5) ; v1(40.5,39.5) 40.5,39.521 45.9,44.921 C27.1@45.979,44.921 ; 40.55,72.5 40.55,72.308 C33.1@42.379,70.479 42.422,70.436 C31.1@44.179,68.679 ; C31.1@44.179,68.679 C23.1@45.979,66.879 ; C23.1@45.979,66.879 C25.1@50.379,62.479 C25.1@50.479,62.479
VCC_TFT: C12.1 C13.1 C14.1 C15.1 C16.1 C17.1 CN5.6 CN5.7 CN5.12 CN5.33 FB4.2 R20.2 R21.2 R22.2 | length 70.5
  Top Layer w0.3: R22.2@1.85,63.997 R21.2@1.85,66.6 R20.2@1.85,69.2 1.875,69.225 1.875,70.975 v1(1.9,71) ; CN5.33@5.415,80.2 9.525,80.2 C13.1@9.725,80.4 C17.1@9.725,83 FB4.2@9.725,85.6 v1(8.3,85.6) ; CN5.12@5.415,90.7 8.939,90.7 9.725,91.486 C14.1@9.725,91.7 C16.1@9.725,94.086 ; CN5.7@5.415,93.2 CN5.6@5.415,93.7 ; CN5.6@5.915,93.7 7.125,93.7 7.4,93.975 7.4,95.1 7.9,95.6 9.725,95.6 ; v1(8,99.5) C12.1@9.725,99.5 C15.1@9.725,96.9 9.725,95.6 ; C16.1@9.725,94.3 9.725,95.6
  Bottom Layer w0.3: v1(1.9,71) 1.9,79.2 v1(8.3,85.6) 6.5,87.4 6.5,98 v1(8,99.5)
pads on no net: CN5.1 CN5.2 CN5.3 CN5.4 CN5.8 CN7.1 CN7.2 NT1.3 SC1.1 SC3.1 SC4.1 U3.3 U3.9 U3.17 U3.19 U3.22 U3.23 U3.24 U3.25 U3.26 U3.27 U4.69 U4.70 U4.143 U5.2 U5.4 U6.4

## Polygon pours and split planes (outlines as drawn)
GND_MCU on Top Layer "GND_3" (solid, remove dead copper, pour order 5): 18,0 18,20.5 145,20.5 145,45 117,45 117,61 126.5,61 134,68.5 134,87 67.5,87 28,87 17.5,87 17.5,102.5 8.5,102.5 6,100 0,100 0,0
GND on Top Layer "GND_3" (solid, remove dead copper, pour order 3): 18,110 18,92.5 136,92.5 136,110
GND on Top Layer "GND_3" (solid, remove dead copper, pour order 2): 18,18.5 18,12 18.5,11.5 18.5,0 145,0 145,18.5
GND_MCU on Bottom Layer "GND_3" (solid, remove dead copper, pour order 6): 18.219,0.118 18.219,20.618 145.219,20.618 145.219,45.118 117.219,45.118 117.219,61.118 126.719,61.118 134.219,68.618 134.219,87.118 67.719,87.118 28.219,87.118 17.719,87.118 17.719,102.618 8.719,102.618 6.219,100.118 0.219,100.118 0.219,0.118
GND on Bottom Layer "GND_3" (solid, remove dead copper, pour order 4): 18,110 18,92.5 136,92.5 138.5,92.5 138.5,100 136,102.5 136,110
GND on Bottom Layer "GND_3" (solid, remove dead copper, pour order 0): 145,54.5 145,95.5 135.5,95.5 135.5,92.5 139.5,92.5 139.5,54.5 119.5,54.5 119.5,46.5 142,46.5 142,15.5 18.5,15.5 18.5,0 145,0 145,15.5

## Keep-outs
Keep-Out Layer:
  the board outline again, w0.2

## Silkscreen, mask and mechanical layers (free items; w line width, h text height)
Top Overlay:
  drawing of 139 lines, arcs and shapes, not listed
  text "12" at 18.85,106.1 h1.6 r90
  text "LD" at 18.85,103.75 h1.6 r90
  text "RL" at 18.85,101.2 h1.6 r90
  text "GD" at 18.831,98.5 h1.6 r90
  text "M" at 18.85,96.45 h1.6 r90
  text "K1" at 19.425,87.2 h1.6
  text "RST" at 31.85,84.169 h1.6
  text "K2" at 23.775,78 h1.6
  text "K3" at 23.85,71.419 h1.6
  text "R32" at 66.056,64.431 h1.6 r90
  text "R33" at 68.206,64.425 h1.6 r90
  text "R34" at 70.356,64.428 h1.6 r90
  text "R35" at 72.506,64.422 h1.6 r90
  text "R36" at 74.656,64.425 h1.6 r90
  text "R38" at 76.806,64.425 h1.6 r90
  text "R39" at 78.956,64.425 h1.6 r90
  text "+12" at 143.475,63.825 h1.6 r90
  text "5V" at 115.256,63.6 h1.6 r90
  text "U1" at 67.373,61.494 h1.6
  text "C47" at 76.806,60.75 h1.6 r90
  text "FB6" at 78.956,60.75 h1.6 r90
  text "GND" at 143.456,58.4 h1.6 r90
  text "R9" at 70.356,57.523 h1.6 r90
  text "R6" at 72.506,57.524 h1.6 r90
  text "R5" at 74.656,57.52 h1.6 r90
  text "R4" at 76.823,57.526 h1.6 r90
  text "R3" at 78.956,57.524 h1.6 r90
  text "R31" at 66.056,57.225 h1.6 r90
  text "R10" at 68.206,57.127 h1.6 r90
  text "5V" at 113.115,46.594 h1.6 r90
  text "+5" at 144.306,35.725 h1.6 r90
  text "RX" at 144.325,33.225 h1.6 r90
  text "H" at 52.7,31.4 h1.6
  text "L" at 57.85,31.4 h1.6
  text "TX" at 144.325,30.725 h1.6 r90
  text "SD" at 31.856,29.975 h1.6 r90
  text "3V" at 34.356,29.975 h1.6 r90
  text "SC" at 36.856,29.975 h1.6 r90
  text "GD" at 39.356,29.975 h1.6 r90
  text "GD" at 144.306,28.05 h1.6 r90
  text "R7" at 140.849,21.677 h1.6
  text "ZD1" at 138.923,18.449 h1.6 r90
  text "C2" at 141.106,18.449 h1.6 r90
  text "R8" at 143.306,18.449 h1.6 r90
  text "CN1" at 141.112,12.535 h1.6 r90
  text "SPK" at 1.468,11.746 h1.6

## Dimensions
0,0 to 0,110 on Mechanical 1
0,0 to 145,0 on Mechanical 1

## Text inside footprints (layer, text, board x,y; h text height)
C35: Top Overlay "-" at 15.745,61.533 h0.7 r270
C40: Top Overlay "-" at 27.867,31.9 h0.7